# Altium PCB Power_PCB.PcbDoc
Units mil, origin at the board's own origin, x right, y up, seen from the top; angles counter-clockwise.
Board outline 4500 x 2600 mil, 2 copper layers (Top Layer, Bottom Layer), stack 60.4 mil thick; 20 components, 27 nets, 87 pads, 0 vias.
Unrouted connection lines stored in the file: 37.
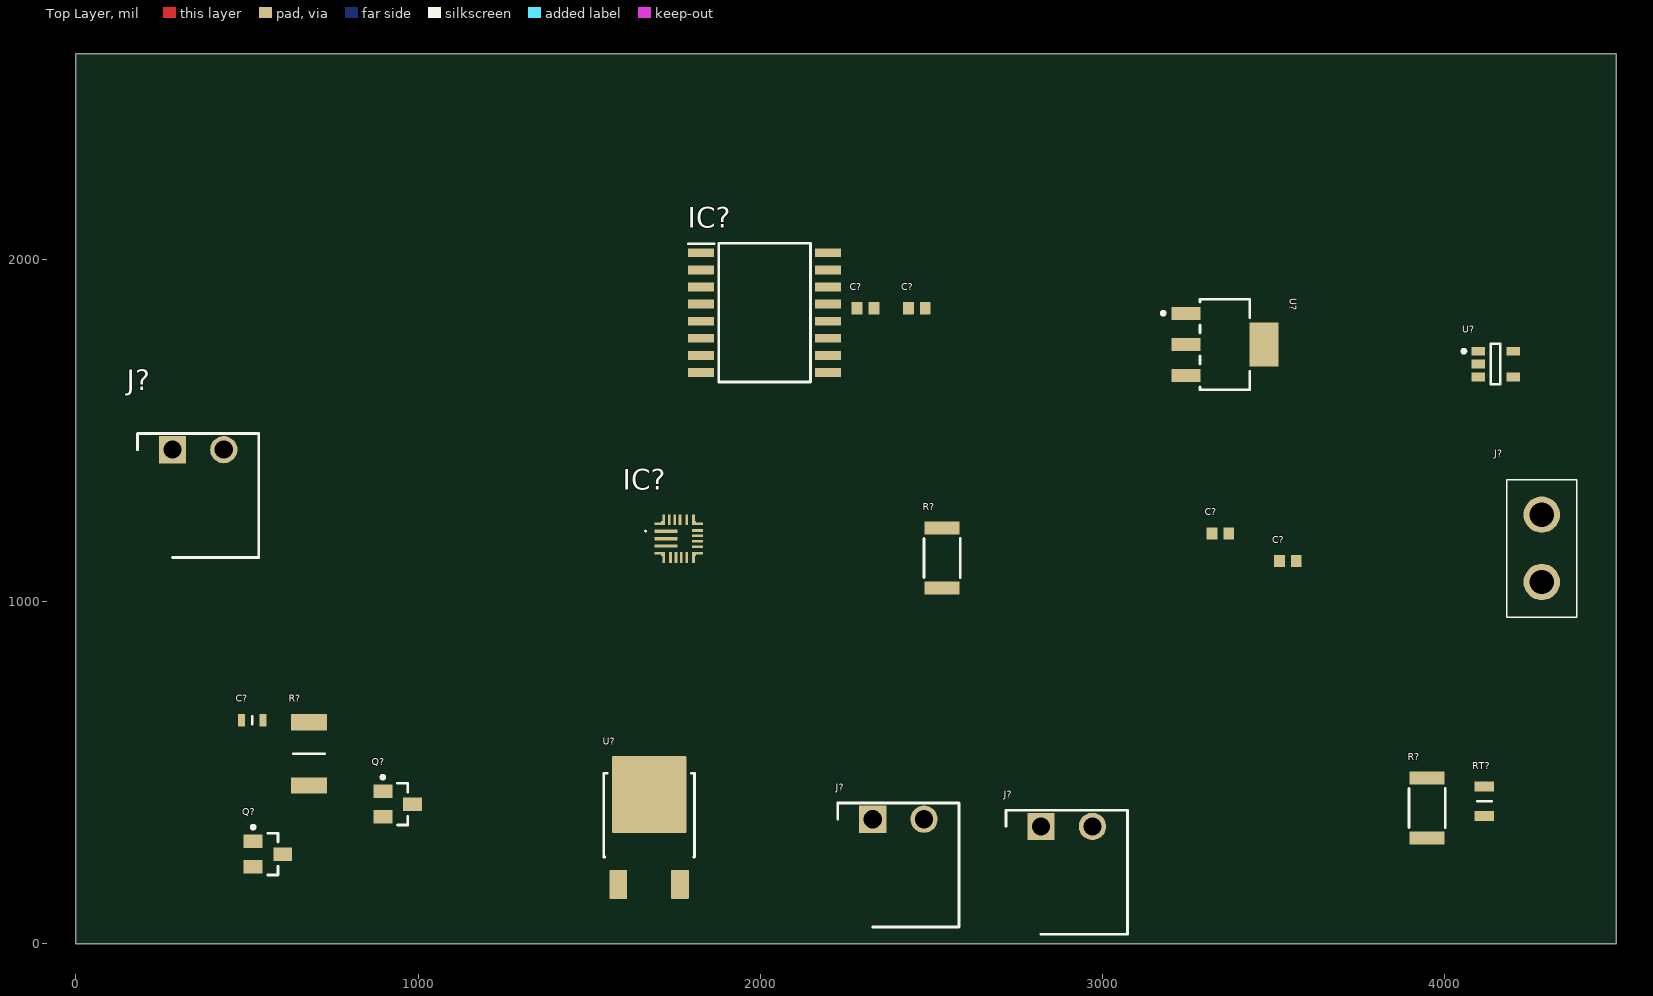
[diagram p0: Top Layer view]
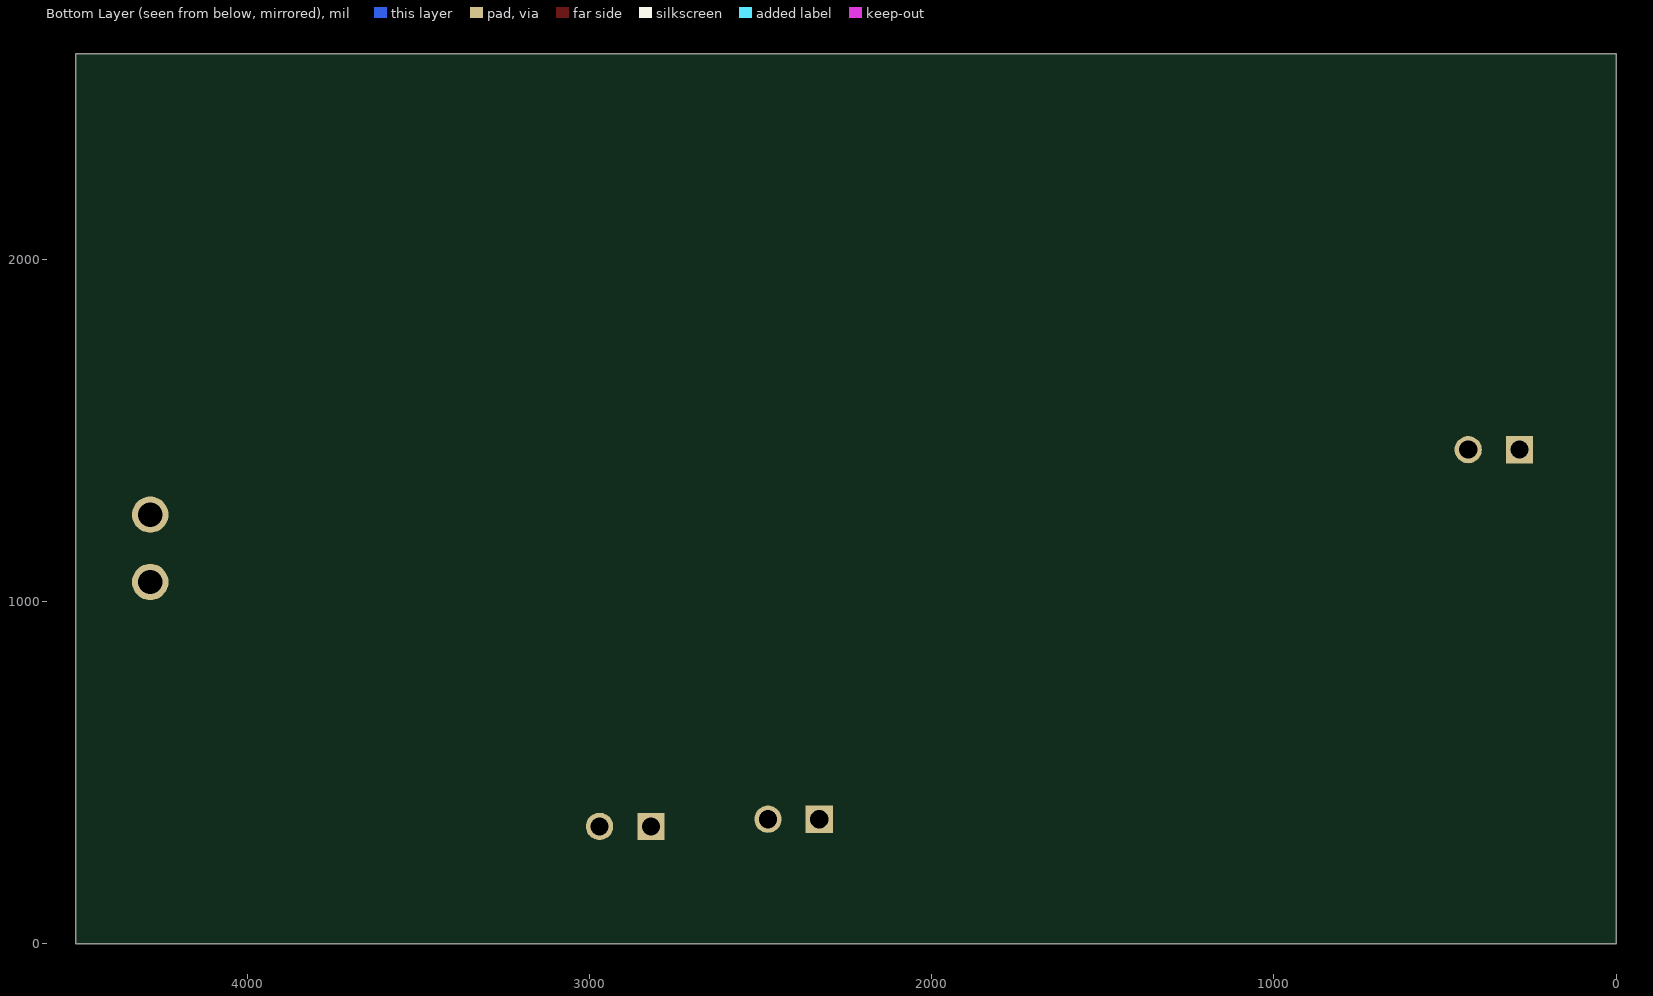
[diagram p1: Bottom Layer view, seen from below]

## Layer stack, top to bottom
Top Solder: solder mask 0.5, Solder Resist, Dk 3.3
Top Layer: signal copper 0.7
Dielectric1: core 59, FR-4, Dk 4.3
Bottom Layer: signal copper 0.7
Bottom Solder: solder mask 0.5, Solder Resist, Dk 3.3

## Board outline
0,0 4500,0 4500,2600 0,2600

## Design rules (kind name [scope] priority, off if disabled: settings)
Clearance [All] p1: gap=10 ignorepadtopadclearanceinfootprint=FALSE
HoleSize [All] p1: absolutevalues=TRUE maxlimit=300 minlimit=10 maxpercent=80.000 minpercent=20.000
MinimumAnnularRing [All] p1: minimumring=10
PasteMaskExpansion [All] p1: expansion=10
PlaneClearance [All] p1: clearance=15
PlaneConnect [All] p1: pad.planeconnectstyle=Relief pad.reliefexpansion=20 pad.reliefentries=4 pad.reliefconductorwidth=10 pad.reliefairgap=10 via.planeconnectstyle=Direct via.reliefexpansion=20 via.reliefentries=4 via.reliefconductorwidth=10 via.reliefairgap=10
PolygonConnect [All] p1: connectstyle=Relief reliefconductorwidth=10 reliefentries=4 polygonreliefangle="90 Angle" airgapwidth=10
RoomDefinition Power [InComponentClass('Power')] p1: confinementstyle=ConfineIn formatcopy=TRUE lockcomponents=FALSE outline 4768,831 5118,831 5118,1227 4768,1227
RoutingVias [All] p1: holewidth=28 width=50 viastyle="Through Hole" minholewidth=28 minwidth=50 maxholewidth=28 maxwidth=50
SMDNeckDown [All] p1: percent=100.000
SilkToSolderMaskClearance SilkscreenOverComponentPads [IsPad] p1: minsilkscreentomaskgap=10 clearancetoexposedcopper=TRUE
SolderMaskExpansion [All] p1: expansion=10 istentingtop=FALSE
SupplyNets "Schematic Supply Nets_9" [InNet('VCC')] p1: voltage=0.000
SupplyNets "Schematic Supply Nets_8" [InNet('VIN')] p2: voltage=0.000
SupplyNets "Schematic Supply Nets_7" [InNet('+3V3')] p3: voltage=0.000
SupplyNets "Schematic Supply Nets_6" [InNet('+6V')] p4: voltage=0.000
SupplyNets "Schematic Supply Nets_5" [InNet('5V')] p5: voltage=0.000
SupplyNets "Schematic Supply Nets_4" [InNet('3V3')] p6: voltage=0.000
SupplyNets "Schematic Supply Nets_3" [InNet('+5V')] p7: voltage=0.000
SupplyNets "Schematic Supply Nets_2" [InNet('1V8')] p8: voltage=0.000
SupplyNets "Schematic Supply Nets_1" [InNet('GND')] p9: voltage=0.000
SupplyNets "Schematic Supply Nets" [InNet('+1V8')] p10: voltage=0.000
Width [All] p1: maxlimit=10 minlimit=10 preferedwidth=10
25 further rules are at their usual default settings.

## Classes and differential pairs
component class Battery: C? IC? Q? R? RT?
component class Power: C? IC? R?
component class PDB_Connectors: J?

## Components (designator, comment, footprint, x,y, rotation, side; value= is the part's Value field where it differs from the comment)
C? "CC0603JRX7R7BB105" CAPC1608X90N 515,653 r0 top
C? "1uF" CAPC1608X87X35LL15T15 3541,1118 r0 top
C? "1uF" CAPC1608X87X35LL15T15 3344,1199 r0 top
C? "1uF" CAPC1608X87X35LL15T15 2307,1857 r0 top
C? "1uF" CAPC1608X87X35LL15T15 2457,1857 r0 top
IC? "MP2759AGQ-0000-Z" MP2759GQ0000P 1761,1184 r0 top
IC? "DS2715BZ+T&R" SOIC127P1032X265-16N 2012.38,1844 r0 top
J? "XT30PB" XT30PB 4283,1253.85 r0 top
J? "5444262" SHDR2W80P0X381_1X2_901X920X740P 2820,343 r0 top
J? "5444262" SHDR2W80P0X381_1X2_901X920X740P 2328,364 r0 top
J? "5444262" SHDR2W80P0X381_1X2_901X920X740P 282,1443.85 r0 top
Q? "BSS138" FAIR-SOT23-3_V 561,262 r0 top
Q? "BSS84" FAIR-SOT23-3_V 940,408 r0 top
R? "2K" RESC5025X70N 681,555 r90 top
R? "10K" FP-CRGCQ2010-IPC_C 3948,397 r90 top value=10KΩ
R? "10K" FP-CRGCQ2010-IPC_C 2531,1127 r90 top value=10KΩ
RT? "NTCS0805E3103FLT" THRMC2012X95N 4115.14,416.31 r90 top
U? "LP38690DTX" FP-NDP0003B-MFG 1675,346 r90 top
U? "MIC5504-1.8YM5-TR" FP-SOT23-5LD-PL-1-MFG 4148,1694 r0 top
U? "LM3940IMP-3.3/NOPB" FP-DCY0004A-MFG 3357,1751 r0 top

## Footprints (in the part's own frame and the unit in brackets; to place one, negate y for a bottom-side part, rotate by r counter-clockwise, add the part's x,y. Pads: shape width x height; smd on the part's side, far side on the other; paste and mask are expansions set on the pad)
CAPC1608X87X35LL15T15 [mm] "Chip Capacitor, 2-Leads, Body 1.60x0.80mm, IPC High Density"
  rect 0.8x0.9 smd: 1(-0.625,0) 2(0.625,0)
  body extent -0.87,-0.48 0.87,0.48, height 0.87
CAPC1608X90N [mm]
  rect 0.54x0.94 smd: 1(-0.8,0) 2(0.8,0)
  silkscreen extent 0,-0.3 0,0.3, body extent -0.8,-0.4 0.8,0.4, height 0.9
FAIR-SOT23-3_V [mm] "SOT23, 3-Leads, Body 3.12x1.5mm, Pitch 0.95mm"
  rect 1.4x1 smd: 1(-1.1,0.95) 2(-1.1,-0.95) 3(1.1,0)
  silkscreen extent -1.22,-1.55 0.75,2.12, body extent -1.35,-1.56 1.35,1.56, height 1.2
FP-CRGCQ2010-IPC_C [mil]
  rect 37.72x102.61 smd paste+0 mask+0: 1(-87.68,0) 2(87.68,0)
  silkscreen extent -57,-53 57,53, body extent -110,-57 110,57, height 10
FP-DCY0004A-MFG [mm]
  rect 2.15x0.95 smd paste+0 mask+0: 1(-2.9,2.3) 2(-2.9,0) 3(-2.9,-2.3)
  rect 2.15x3.25 smd paste+0 mask+0: 4(2.9,0)
  silkscreen extent -4.7,-3.35 1.85,3.35, body extent -4.08,-3.45 4.08,3.45, height 0.25
FP-NDP0003B-MFG [mm]
  rrect8% 2.15x1.3 smd paste+0 mask+0: 1(-4.38,2.285) 3(-4.38,-2.285)
  rrect2% 5.7x5.5 smd paste-1000 mask+0: 4(2.285,0)
  silkscreen extent -2.34,-3.36 3.88,3.36, body extent -5.56,-3.46 5.24,3.46, height 0.25
FP-SOT23-5LD-PL-1-MFG [mm]
  rect 1x0.66 smd paste+0 mask+0: 1(-1.3,0.95) 2(-1.3,0) 3(-1.3,-0.95) 4(1.3,-0.95) 5(1.3,0.95)
  silkscreen extent -2.47,-1.5 0.35,1.5, body extent -1.9,-1.6 1.9,1.6, height 0.25
MP2759GQ0000P [mm]
  rect 1.7x0.25 smd: 1(-0.95,0.55) 2(-0.95,0) 3(-0.95,-0.55)
  rect 0.3x0.3 smd: 4(-1.15,-1.15) 9(1.15,-1.15) 14(1.15,1.15) 19(-1.15,1.15)
  rect 0.2x0.8 smd: 5(-0.6,-1.4) 6(-0.2,-1.4) 7(0.2,-1.4) 8(0.6,-1.4) 15(0.6,1.4) 16(0.1,1.4) 17(-0.3,1.4) 18(-0.7,1.4)
  rect 0.8x0.2 smd: 10(1.4,-0.6) 11(1.4,-0.2) 12(1.4,0.2) 13(1.4,0.6)
  rect 0.5x0.2 smd: 20(-1.55,-1.1) 23(1.55,-1.1) 24(1.55,1.1) 27(-1.55,1.1)
  rect 0.2x0.5 smd: 21(-1.1,-1.55) 22(1.1,-1.55) 25(1.1,1.55) 26(-1.1,1.55)
  silkscreen extent -2.5,0.5 -2.4,0.6, body extent -1.51,-1.51 1.51,1.51, height 0.85
RESC5025X70N [mm]
  rect 1.2x2.7 smd: 1(-2.35,0) 2(2.35,0)
  silkscreen extent 0,-1.15 0,1.15, body extent -2.5,-1.25 2.5,1.25, height 0.7
SHDR2W80P0X381_1X2_901X920X740P [mm]
  rect 2.025x2.025 hole 1.35: 1(0,0)
  round 2.025 hole 1.35: 2(3.81,0)
  silkscreen extent -2.6,-8 6.41,1.2, body extent -2.71,-8.15 6.52,1.35, height 7.6
SOIC127P1032X265-16N [mm]
  rect 1.925x0.65 smd: 1(-4.712,4.445) 2(-4.712,3.175) 3(-4.712,1.905) 4(-4.712,0.635) 5(-4.712,-0.635) 6(-4.712,-1.905) 7(-4.712,-3.175) 8(-4.712,-4.445) 9(4.712,-4.445) 10(4.712,-3.175) 11(4.712,-1.905) 12(4.712,-0.635) 13(4.712,0.635) 14(4.712,1.905) 15(4.712,3.175) 16(4.712,4.445)
  silkscreen extent -5.68,-5.15 3.4,5.15, body extent -5.16,-5.15 5.16,5.15, height 2.65
THRMC2012X95N [mm]
  rect 0.75x1.45 smd: 1(-1.1,0) 2(1.1,0)
  silkscreen extent 0,-0.53 0,0.53, body extent -1,-0.63 1,0.63, height 0.95
XT30PB [mm]
  round 2.7 hole 1.8: 1(0,0) 2(0,-5)
  silkscreen extent -2.6,-7.6 2.6,2.6, body extent -2.6,-7.6 2.6,2.6, height 10.66

## Part data
C?: "Capacitor", Manufacturer_Name=KEMET, Mouser Part Number=603-CC0603JRX77BB105, Arrow Part Number=CC0603JRX7R7BB105, Arrow Price/Stock=https://www.arrow.com/en/products/cc0603jrx7r7bb105/yageo, Datasheet Link=https://datasheet.datasheetarchive.com/originals/distributors/Datasheets_SAMA/d9f127a4875522309d99aa7dec79633c.pdf, Height=0.9mm, Manufacturer_Part_Number=CC0603JRX7R7BB105, Mouser Price/Stock=https://www.mouser.com/Search/Refine.aspx?Keyword=603-CC0603JRX77BB105
C? C? C? C?: library part CMP-2006-03713-1, Manufacturer=Kemet, Part Number=C0603C105K3RACTU
IC?: "Integrated Circuit", Manufacturer_Name="Monolithic Power Systems (MPS)", Mouser Part Number=946-MP2759AGQ-0000-Z, Datasheet Link=https://www.mouser.com/datasheet/2/277/MP2759AGQ-2888162.pdf, Height=1mm, Manufacturer_Part_Number=MP2759AGQ-0000-Z, Mouser Price/Stock=https://www.mouser.co.uk/ProductDetail/Monolithic-Power-Systems-MPS/MP2759AGQ-0000-Z?qs=Rp5uXu7WBW%2F6%252BI1hHvcUXg%3D%3D
IC?: "Integrated Circuit", Manufacturer_Name="Analog Devices", Mouser Part Number=700-DS2715BZT&R, Datasheet Link=https://www.mouser.in/datasheet/2/256/DS2715-1389140.pdf, Height=2.65mm, Manufacturer_Part_Number=DS2715BZ+T&R, Mouser Price/Stock=https://www.mouser.co.uk/ProductDetail/Maxim-Integrated/DS2715BZ%2bTR?qs=LHmEVA8xxfZnvZMuot3c2Q%3D%3D
J?: "Connector", Manufacturer_Name=Amass, Datasheet Link=https://www.tme.eu/Document/4acc913878197f8c2e30d4b8cdc47230/XT30UPB%20SPEC.pdf, Height=10.7mm, Manufacturer_Part_Number=XT30PB
J? J? J?: "Connector", Manufacturer_Name="Phoenix Contact", Mouser Part Number=651-5444262, Arrow Part Number=5444262, Arrow Price/Stock=https://www.arrow.com/en/products/5444262/phoenix-contact?region=nac, Datasheet Link=https://datasheet.datasheetarchive.com/originals/distributors/Datasheets-DGA25/1829481.pdf, Height=7.4mm, Manufacturer_Part_Number=5444262, Mouser Price/Stock=https://www.mouser.co.uk/ProductDetail/Phoenix-Contact/5444262?qs=9Y9qB%2FCsC3lS%2FxAVKTDcmQ%3D%3D
Q?: library part CMP-013-00021-4, "N-Channel Logic Level Enhancement Mode Field Effect Transistor, 220 mA, 50 V, -55 to 150 degC, 3-Pin SOT-23, RoHS, Tape and Reel", Case/Package=TO-236-3, Input Capacitance=27pF, Manufacturer=Fairchild, Max Operating Temperature=150°C, Min Operating Temperature=-55°C, Nominal Dual Supply Voltage=50V, Package Description="3-Pin Small Outline Transistor, Body 2.92 x 1.325 mm, Pitch 0.95 mm", Package Quantity=1, Package Reference=SOT23-3, Package Version="Rev. 12, 03/2016", Power=360mW, Resistance=0.7Ohm, Datasheet URL=https://www.fairchildsemi.com/datasheets/BS/BSS138.pdf, Datasheet Version="Rev. C, 10/2005", Elements=1, Mounting Technology=SM, Nominal Vgs=1.3V, Packaging=TapeandReel, Pins=3, Rds On Max=3.5Ohm, RoHS Compliant=True, Typical Rise Time=9ns
Q?: library part CMP-013-00022-4, "P-Channel Enhancement Mode Field-Effect Transistor, 0.13 A, 50 V, -55 to 150 degC, 3-Pin SOT23, RoHS, Tape and Reel", Case/Package=TO-236-3, Input Capacitance=73pF, Manufacturer=Fairchild, Max Operating Temperature=150°C, Min Operating Temperature=-55°C, Nominal Dual Supply Voltage=-50V, Package Description="3-Pin Small Outline Transistor, Body 2.92 x 1.325 mm, Pitch 0.95 mm", Package Quantity=3000, Package Reference=SOT23-3, Package Version="Rev. 12, 03/2016", Power=360mW, Datasheet URL=https://www.fairchildsemi.com/datasheets/BS/BSS84.pdf, Datasheet Version="Rev. 1.1.0, 02/2013", Elements=1, Mounting Technology=SM, Nominal Vgs=-1.7V, Packaging=TapeandReel, Pins=3, Rds On Max=10Ohm, RoHS Compliant=True, Typical Rise Time=6.3ns
R?: library part CRCW20102K00FKEFHP, "Resistor CRCW20102K00FKEFHP", Manufacturer_Name=Vishay, Mouser Part Number=71-CRCW20102K00FKEFH, Arrow Part Number=CRCW20102K00FKEFHP, Arrow Price/Stock=https://www.arrow.com/en/products/crcw20102k00fkefhp/vishay, Datasheet Link=http://www.vishay.com/docs/20043/crcwhpe3.pdf, Height=0.7mm, Manufacturer_Part_Number=CRCW20102K00FKEFHP, Mouser Price/Stock=https://www.mouser.co.uk/ProductDetail/Vishay-Dale/CRCW20102K00FKEFHP?qs=k2%2FDWSARqgHGhBn8H3HYDw%3D%3D
R? R?: library part CMP-03211-005335-1, "CRGCQ2010 10KΩ 0.75W ±100ppm/°C 1% 200V", Ambient Temperature Range High=+70°C, Manufacturer="TE Connectivity", Manufacturer Part Number=CRGCQ2010F10K, Package=CRGCQ2010, Power Rating=0.75W, Resistance=10KΩ, Temperature="-55°C to +155°C", Temperature Coefficient=±100ppm/°C, Temperature Range High=+155°C, Temperature Range Low=-55°C, Tolerance=0.01, Voltage Rating=200V, Automotive=Yes, Automotive Grade="Grade 0", Category=Res, ComponentLink2Description=Datasheet, ComponentLink2URL=https://www.te.com/commerce/DocumentDelivery/DDEController?Action=showdoc&DocId=Data+Sheet%7F1773204-3%7F1%7Fpdf%7FEnglish%7FENG_DS_1773204-3_1.pdf%7F4-2176347-922, Composition="Thick Film", Device Class L1="Passive Components", Device Class L2=Resistors, Device Class L3="Chip SMD Resistors", Height=0.65mm, Ipc Land Pattern Name=RESC500250X55, Lead Free=Yes, Octopart=https://octopart.com/crgcq2010f10k-te+connectivity-91018452, RoHS=TRUE, Series=CRGCQ
RT?: "Thermistor", Manufacturer_Name=Vishay, Mouser Part Number=594-NTCS0805E3103FLT, Arrow Part Number=NTCS0805E3103FLT, Arrow Price/Stock=https://www.arrow.com/en/products/ntcs0805e3103flt/vishay, Datasheet Link=http://www.vishay.com/docs/29044/ntcs0805e3t.pdf, Height=0.95mm, Manufacturer_Part_Number=NTCS0805E3103FLT, Mouser Price/Stock=https://www.mouser.co.uk/ProductDetail/Vishay-BC-Components/NTCS0805E3103FLT?qs=%2FWiulJ9oly4Pd4lidS66Yw%3D%3D
U?: library part CMP-04917-000019-1, "IC REG LINEAR 3.3V 1A TO252-3 / LP38690DTX-3.3_NOPB", Dropout Voltage=650mV, Manufacturer="Texas Instruments", Manufacturer Part Number=LP38690DTX-3.3/NOPB, Max Junction Temp=+125°C, Max Supply Voltage=10V, Min Supply Voltage=2.7V, Nominal Supply Current=55uA, Output Current=1A, Output Voltage=3.3V, Package=NDP0003B, Temperature="-40°C to +125°C", Temperature Range Low=-40°C, Accuracy Percentage=2.5%, Automotive=No, Category=IC, ComponentLink2Description=Datasheet, ComponentLink2URL=http://www.ti.com/lit/ds/symlink/lp38690.pdf, Device Class L1="Integrated Circuits (ICs)", Device Class L2="Power Management ICs", Device Class L3="Voltage Regulators - Linear", Digikey Description="IC REG LINEAR 3.3V 1A TO252-3", Height=2.72mm, Lead Free=Yes, Mouser Description="LDO Voltage Regulators 1A LDO CMOS Linear Regs Stable", Number of Outputs=1, Octopart=https://octopart.com/lp38690dtx-3.3%2Fnopb-texas+instruments-24816519, Output Type=Fixed, RoHS=TRUE, Standoff Height=0.17mm, Temperature Range High=+125°C
U?: library part CMP-06324-000021-1, "IC REG LINEAR 1.8V 300MA SOT23-5", Dropout Voltage=160mV, Manufacturer=Microchip, Max Junction Temp=+125°C, Max Supply Voltage=5.5V, Min Supply Voltage=2.5V, Nominal Supply Current=38-42uA, Output Current=300mA, Output Voltage=1.8V, Package=SOT23-5LD-PL-1, Temperature="-40°C to +125°C", Temperature Range Low=-40°C, Accuracy Percentage=2%, Automotive=No, Category=IC, ComponentLink2Description=Datasheet, ComponentLink2URL=http://ww1.microchip.com/downloads/en/DeviceDoc/MIC5501-02-03-04-300mA-Single-Output-LDO-in-Small-Packages-DS20006006B.pdf, Device Class L1="Integrated Circuits (ICs)", Device Class L2="Power Management ICs", Device Class L3="Voltage Regulators - Linear", Digikey Description="IC REG LINEAR 1.8V 300MA SOT23-5", Height=1.45mm, Lead Free=Yes, Manufacturer Part Number=MIC5504-1.8YM5-TR, Number of Outputs=1, Octopart=https://octopart.com/mic5504-1.8ym5-tr-microchip-66803399, Output Type=Fixed, RoHS=TRUE, Standoff Height=0mm, Temperature Range High=+125°C
U?: library part CMP-0062-01788-4, "IC REG LINEAR 3.3V 1A SOT223-4", Case/Package=SOT-223, Current Rating=1A, Dropout Voltage=500mV, Max Input Voltage=7.5V, Max Operating Temperature=125°C, Max Output Voltage=3.3V, Min Input Voltage=4.5V, Min Operating Temperature=-40°C, Package Quantity=1000, Quiescent Current=15mA, Contact Plating=Tin, Height=1.6mm, Lead Free="Lead Free", Length=6.5mm, Max Output Current=1A, Max Supply Voltage=7.5V, Min Supply Voltage=4.5V, Mount="Surface Mount", Nominal Output Voltage=3.3V, Number of Outputs=1, Number of Pins=4, Number of Regulators=1, Output Configuration=Positive, Output Current=1A, Output Type=Fixed, Output Voltage=3.3V, Packaging="Tape and Reel", Polarity=Positive, Radiation Hardening=No, REACH SVHC="No SVHC", Series=-, Termination=SMD/SMT, Width=3.56mm

## Nets (pads, with @x,y where several pads share a name; then routed paths per layer and width w, separated by ;. In a path a pad name is that pad's centre, name@x,y a point inside that pad or via, vN(x,y) a via of type N, cw(c..) or ccw(c..) an arc to the next point about the centre after c; other vN are vias at no path point)
1V8: J?.1@282,1443.85
3V3: J?.1@2328,364
5V: J?.1@2820,343
+1V8: C?.2@2481.61,1857 U?.5
+3V3: U?.3@3242.83,1660.45
+5V: C?.2@2331.61,1857 C?.2@3368.61,1199 U?.1
+6V: C?.2@3565.61,1118 U?.3@1764.96,173.56
ACOK: IC?.9@1806.28,1138.72 IC?.22 IC?.23
BST: IC?.4@1715.72,1138.72 IC?.20 IC?.21
CELL: IC?.10@1816.12,1160.38
CSP: IC?.15@1784.62,1239.12
GND: C?.1@2282.39,1857 C?.1@2432.39,1857 C?.1@3319.39,1199 C?.1@3516.39,1118 IC?.5@1737.38,1128.88 IC?.6@1753.13,1128.88 IC?.7@1768.87,1128.88 IC?.11@2197.9,1769 IC?.16@1764.94,1239.12 J?.2@432,1443.85 J?.2@2478,364 J?.2@2970,343 Q?.2@517.69,224.6 R?.2@2531,1214.68 RT?.2 U?.2 U?.4@1675,435.96 U?.4@3471.17,1751
ILIM: IC?.13@1816.12,1207.62
ISET: IC?.18
NetC?_1: IC?.7@1826.87,1719 IC?.8@1826.87,1669 IC?.12@2197.9,1819
NetC?_2: IC?.2@1723.6,1184 Q?.2@896.69,370.6
NetD?_1: Q?.1@896.69,445.4
NetD?_2: 
NetQ?_1: Q?.1@517.69,299.4
NTC: IC?.12@1816.12,1191.87 R?.2@3948,484.68 RT?.1
STAT: IC?.8@1784.62,1128.88
SW: IC?.3@1723.6,1162.35
VB: IC?.11@1816.12,1176.13
VBAT: C?.1@483.5,653 IC?.14@1806.28,1229.28 IC?.24 IC?.25 Q?.3@983.31,408
VCC: IC?.17 R?.1@3948,309.32
VIN: C?.2@546.5,653 IC?.1@1723.6,1205.65 R?.2@681,647.52
VLIM: IC?.19 IC?.26 IC?.27 Q?.3@604.31,262 R?.1@681,462.48 R?.1@2531,1039.32
pads on no net: IC?.1@1826.87,2019 IC?.2@1826.87,1969 IC?.3@1826.87,1919 IC?.4@1826.87,1869 IC?.5@1826.87,1819 IC?.6@1826.87,1769 IC?.9@2197.9,1669 IC?.10@2197.9,1719 IC?.13@2197.9,1869 IC?.14@2197.9,1919 IC?.15@2197.9,1969 IC?.16@2197.9,2019 J?.1@4283,1253.85 J?.2@4283,1057 U?.3@4096.82,1656.6 U?.4@4199.18,1656.6